# EAGLE board 12VAttinyDischargeChecker-A (EAGLE 8.5.2)

Size 100.33 x 70 mm. Coordinates in mm from the lower left corner, seen from the top.
Outline: 0,69.85 0,0 100.33,0 100.33,69.85
Outline: 0,69.85 0,70
Outline: 0,69.85 100,69.85
Copper layers (1*16): Top 0.035mm / dielectric 1.5mm / Bottom 0.035mm
Design rules "default": minimum track width 10mil, minimum drill 24mil, track to track 8mil, track to pad 8mil, pad to pad 8mil, via to via 8mil, smd to smd 8mil, copper to edge 40mil, drill to drill 8mil, minimum pad ring 10mil, minimum via ring 8mil, stop-mask expansion 4mil, vias tented up to drill 0mil, thermal gap 10mil

## Footprints (pad centres in the part's own frame; a part is rotated, then mirrored left to right if it is on the bottom)
0204/7 = drill 0.813 octagon: 1 -3.81,0; 2 3.81,0
DIL08 = drill 0.813 long: 1 -3.81,-3.81; 2 -1.27,-3.81; 3 1.27,-3.81; 4 3.81,-3.81; 5 3.81,3.81; 6 1.27,3.81; 7 -1.27,3.81; 8 -3.81,3.81
DIL28-3 = drill 0.813 long: 1 -16.51,-3.81; 2 -13.97,-3.81; 3 -11.43,-3.81; 4 -8.89,-3.81; 5 -6.35,-3.81; 6 -3.81,-3.81; 7 -1.27,-3.81; 8 1.27,-3.81; 9 3.81,-3.81; 10 6.35,-3.81; 11 8.89,-3.81; 12 11.43,-3.81; 13 13.97,-3.81; 14 16.51,-3.81; 15 16.51,3.81; 16 13.97,3.81; 17 11.43,3.81; 18 8.89,3.81; 19 6.35,3.81; 20 3.81,3.81; 21 1.27,3.81; 22 -1.27,3.81; 23 -3.81,3.81; 24 -6.35,3.81; 25 -8.89,3.81; 26 -11.43,3.81; 27 -13.97,3.81; 28 -16.51,3.81
WIRELESS-RX = drill 0.8 long: P$2 7.62,0; P$3 5.08,0; P$4 2.54,0; P$5 10.16,0
WIRELESS-TX = drill 0.8 long: P$1 2.54,2.54; P$2 0,2.54; P$3 -2.54,2.54
MA04-1 = drill 1.016 long: 1 -3.81,0; 2 -1.27,0; 3 1.27,0; 4 3.81,0
TO92- = drill 0.813 long: 1 2.54,0; 2 0,0; 3 -2.54,0
1X01/90 = drill 1.016 long: 1 -1.27,-3.81
E5-8,5 = drill 1.016 pad 2.54: + -2.54,0 | drill 1.016 pad 2.54 octagon: - 2.54,0
P1-17Y = drill 1.702 pad 2.121 long: TP 0,0
MA06-1 = drill 1.016 long: 1 -6.35,0; 2 -3.81,0; 3 -1.27,0; 4 1.27,0; 5 3.81,0; 6 6.35,0
W237-132 = drill 1.194 long: 1 -2.54,-0.635; 2 2.54,-0.635
RS-2,5 = drill 0.813 pad 1.6 octagon: 1 -1.27,0; 2 1.27,0
2X02/90 = drill 1.016 octagon: 1 -1.27,-6.35; 2 -1.27,-3.81; 3 1.27,-6.35; 4 1.27,-3.81
PAK100/2500-10 = drill 1 pad 1.422: 1 -5.08,-1.27; 2 -5.08,1.27; 3 -2.54,-1.27; 4 -2.54,1.27; 5 0,-1.27; 6 0,1.27; 7 2.54,-1.27; 8 2.54,1.27; 9 5.08,-1.27; 10 5.08,1.27

## Placement (x,y rotation side)
E$1  [0204/7]  8.89,20.32 180 top
E$2  [DIL08]  9.53,8.26 270 top
E$3  [DIL28-3]  8.89,42.55 270 top
E$4  [DIL28-3]  23.5,42.55 270 top
E$5  [WIRELESS-RX]  55.24,50.8 0 top
E$6  [WIRELESS-TX]  50.8,38.1 0 top
E$8  [MA04-1]  15.88,8.26 90 top
E$9  [MA04-1]  3.17,8.26 90 top
E$10  [0204/7]  8.89,17.78 180 top
E$11  [0204/7]  25.4,20.32 180 top
E$12  [0204/7]  25.4,17.78 180 top
E$13  [0204/7]  41.91,17.78 180 top
E$14  [0204/7]  41.91,20.32 180 top
E$15  [0204/7]  58.42,17.78 180 top
E$16  [0204/7]  58.42,20.32 180 top
E$17  [0204/7]  113.03,25.4 90 top  (outside the outline)
E$18  [TO92-]  104.14,55.88 90 top  (outside the outline)
E$19  [0204/7]  74.93,17.78 180 top
E$20  [0204/7]  74.93,20.32 180 top
E$21  [0204/7]  91.44,17.78 180 top
E$22  [1X01/90]  112.39,40.01 180 top  (outside the outline)
E$23  [E5-8,5]  106.05,25.4 270 top  (outside the outline)
E$24  [P1-17Y]  27.94,66.04 0 top
E$25  [0204/7]  91.44,20.32 180 top
E$26  [MA04-1]  102.87,15.24 90 top
E$28  [MA06-1]  103.93,39.79 90 top  (outside the outline)
E$29  [W237-132]  105.73,66.04 180 top
E$30  [RS-2,5]  113.03,50.8 90 top  (outside the outline)
E$31  [2X02/90]  108.78,51.77 180 top  (outside the outline)
E$35  [MA04-1]  113.03,13.97 90 top  (outside the outline)
E$42  [P1-17Y]  11.43,66.04 0 top
E$43  [P1-17Y]  6.35,66.04 0 top
E$44  [P1-17Y]  107.95,39.37 0 top  (outside the outline)
E$45  [DIL08]  106.68,3.81 270 top
E$47  [P1-17Y]  22.86,66.04 0 top
E$48  [P1-17Y]  44.45,66.04 0 top
E$49  [P1-17Y]  39.37,66.04 0 top
E$50  [P1-17Y]  60.96,66.04 0 top
E$51  [P1-17Y]  55.88,66.04 0 top
E$52  [P1-17Y]  77.47,66.04 0 top
E$53  [P1-17Y]  72.39,66.04 0 top
E$54  [P1-17Y]  93.98,66.04 0 top
E$55  [P1-17Y]  88.9,66.04 0 top
E$61  [PAK100/2500-10]  51.44,4.45 0 top

## Library data of the parts
E$1 E$10-E$17 E$19-E$21 E$25 = eagle-ltspice
E$2-E$4 E$45 = 74xx-us
E$5 E$6 = LSGPackages
E$8 E$9 E$26 E$28 E$35 = con-lstb
E$18 = transistor-fet
E$22 E$31 = pinhead
E$23 = ref-packages-longpad
E$24 E$42-E$44 E$47-E$55 = testpad
E$29 = con-wago-508
E$30 = discrete
E$61 = con-3m

## Nets
S$2: E$1.1 E$12.1
S$3: E$2.5
S$4: E$1.2 E$10.2
S$5: E$11.2 E$12.2
S$18: E$10.1
S$19: E$13.2 E$14.2
S$20: E$15.2 E$16.2
S$21: E$19.2 E$20.2
S$22: E$21.2 E$25.2
S$23: E$11.1 E$13.1
S$24: E$14.1 E$15.1
S$25: E$16.1 E$19.1
S$26: E$20.1 E$21.1

## Tracks (layer width: path | path; a pad name or v marks a point on that pad's centre or on a via)
S$2  (1 unrouted)
S$4  (1 unrouted)
S$5  (1 unrouted)
S$19  (1 unrouted)
S$20  (1 unrouted)
S$21  (1 unrouted)
S$22  (1 unrouted)
S$23  (1 unrouted)
S$24  (1 unrouted)
S$25  (1 unrouted)
S$26  (1 unrouted)

## Text on the board
bTest: 5v | - | - | - | - | - | - | + | + | + | + | + | + | 70v | - | 56v | - | 42v | - | 28v | - | 14v | - | 0v | - | 84v | 70v | 56v | 42v | 28v | 14v